# Altium PCB rx_2-5.PcbDoc
Units mm, origin at the board's own origin, x right, y up, seen from the top; angles counter-clockwise.
Board outline 133 x 84.5 mm, 2 copper layers (F.Cu, B.Cu); 65 components, 34 nets, 162 pads, 132 vias.
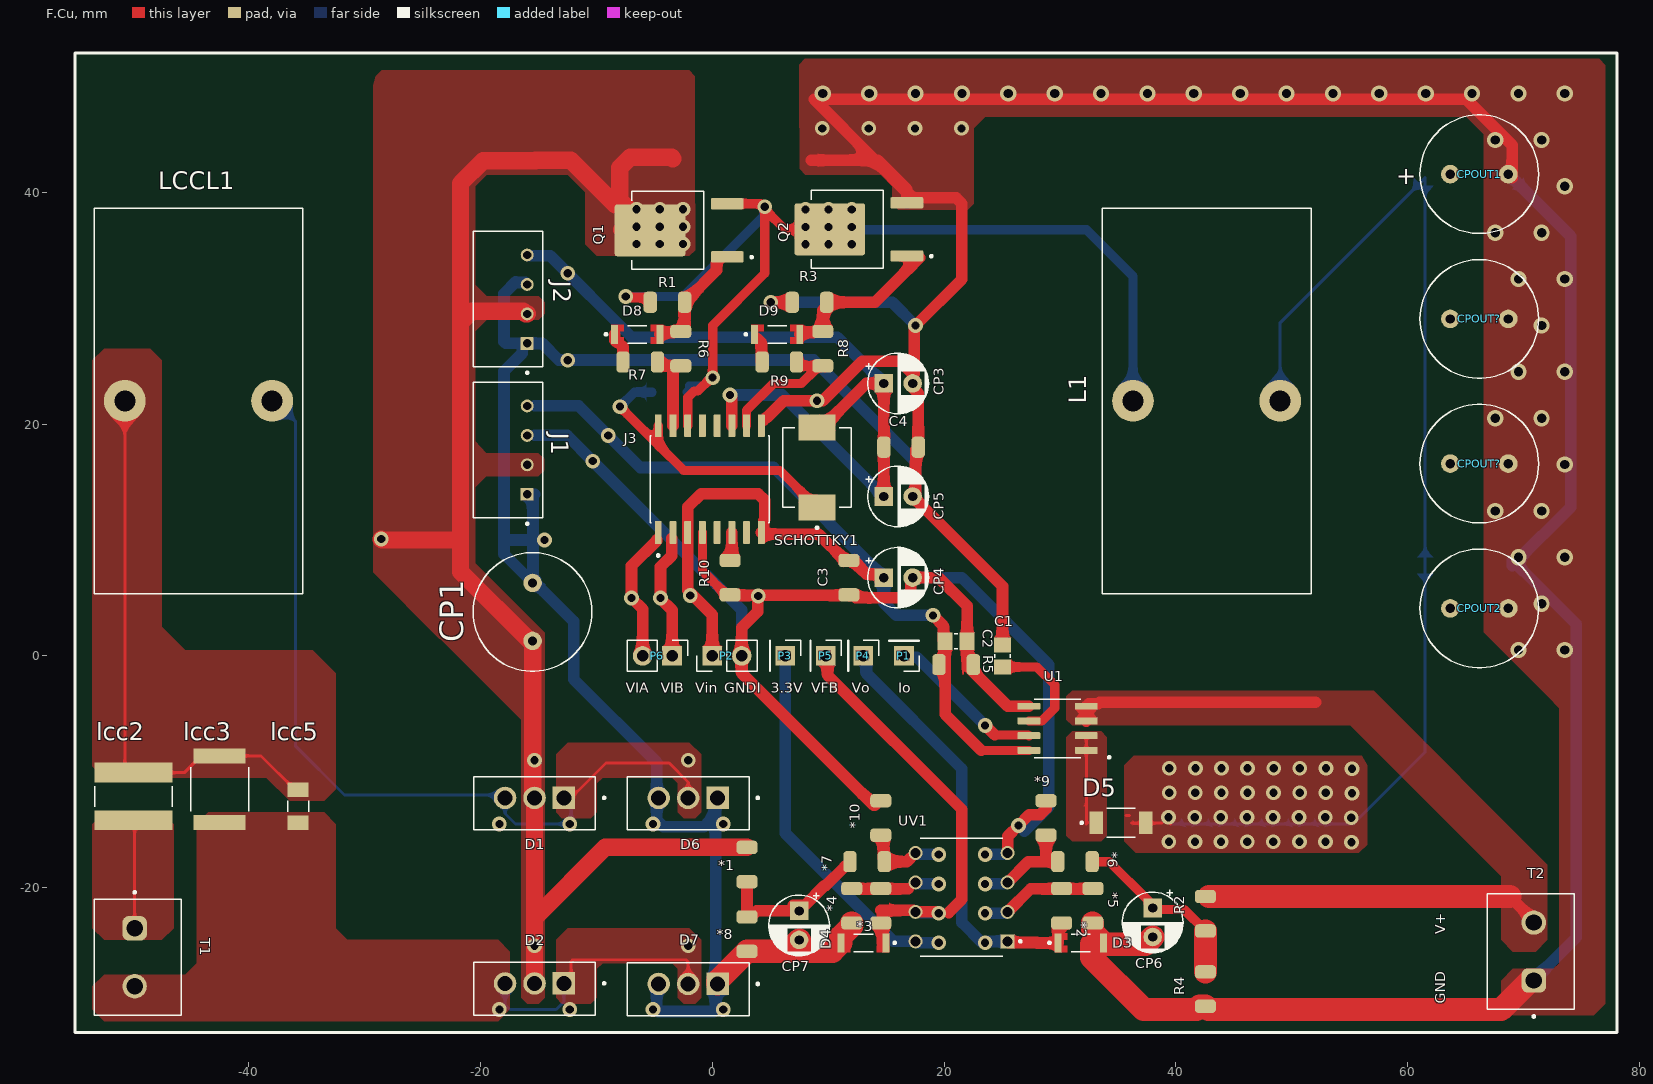
[diagram p0: F.Cu view]
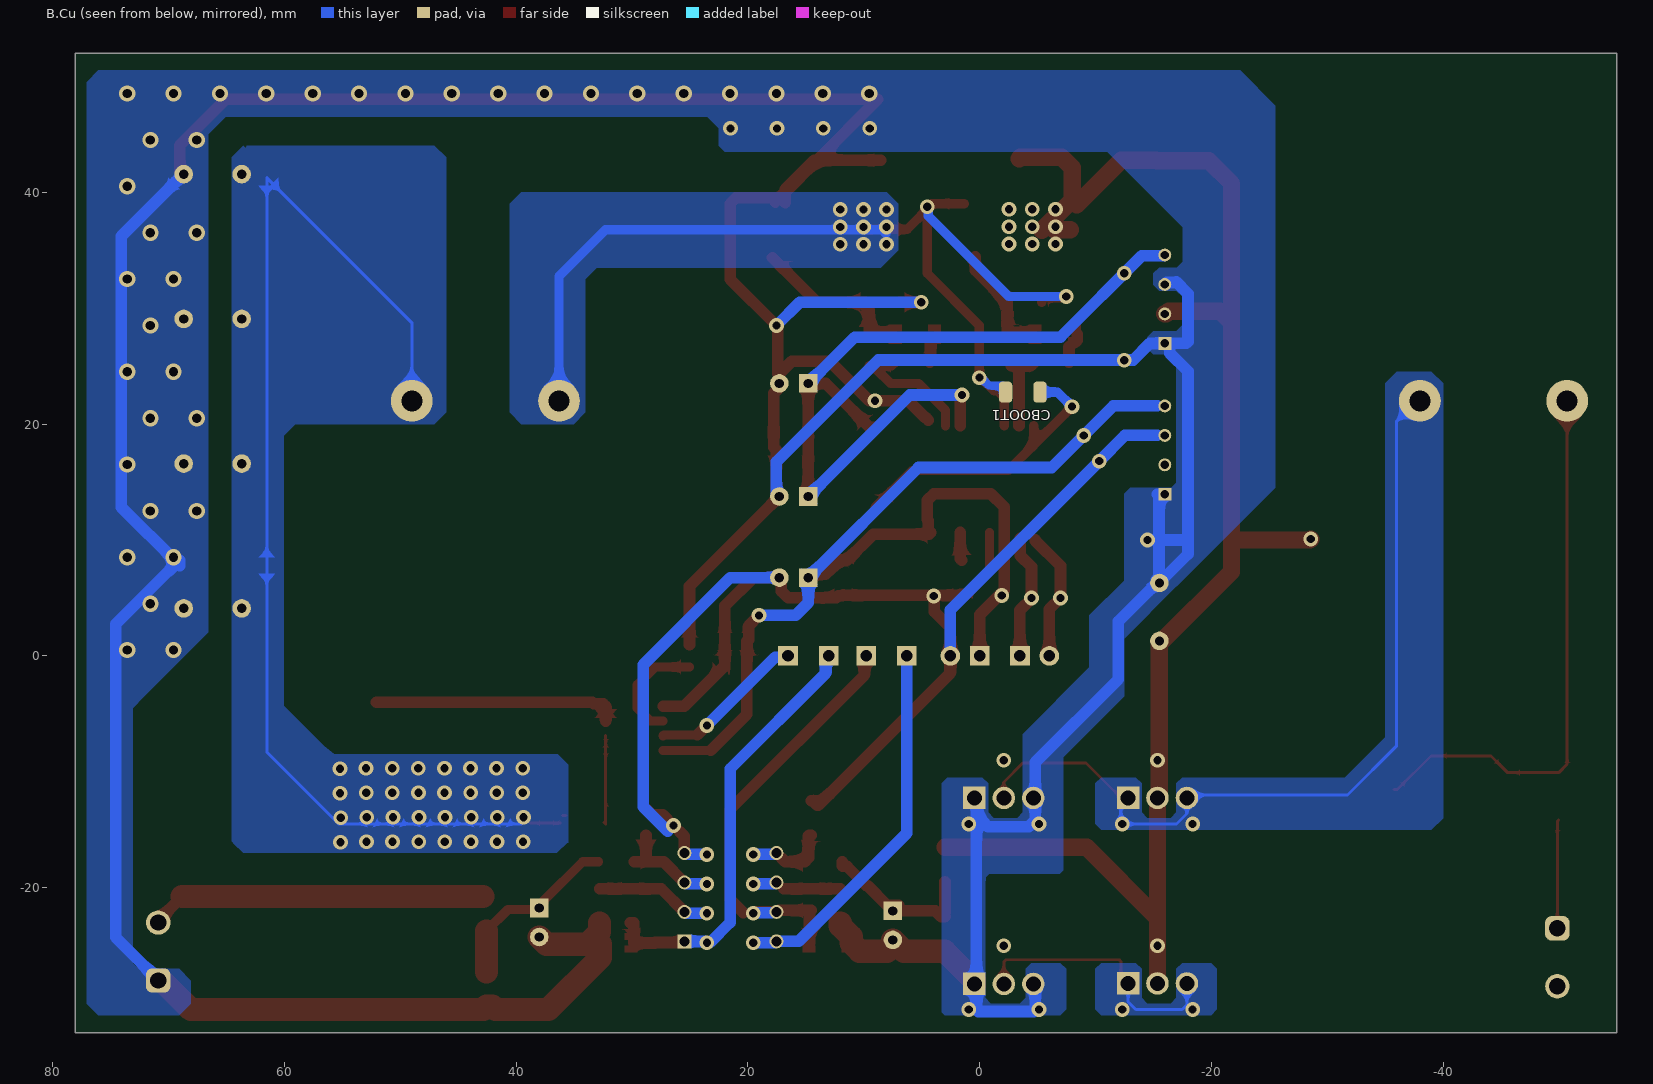
[diagram p1: B.Cu view, seen from below]
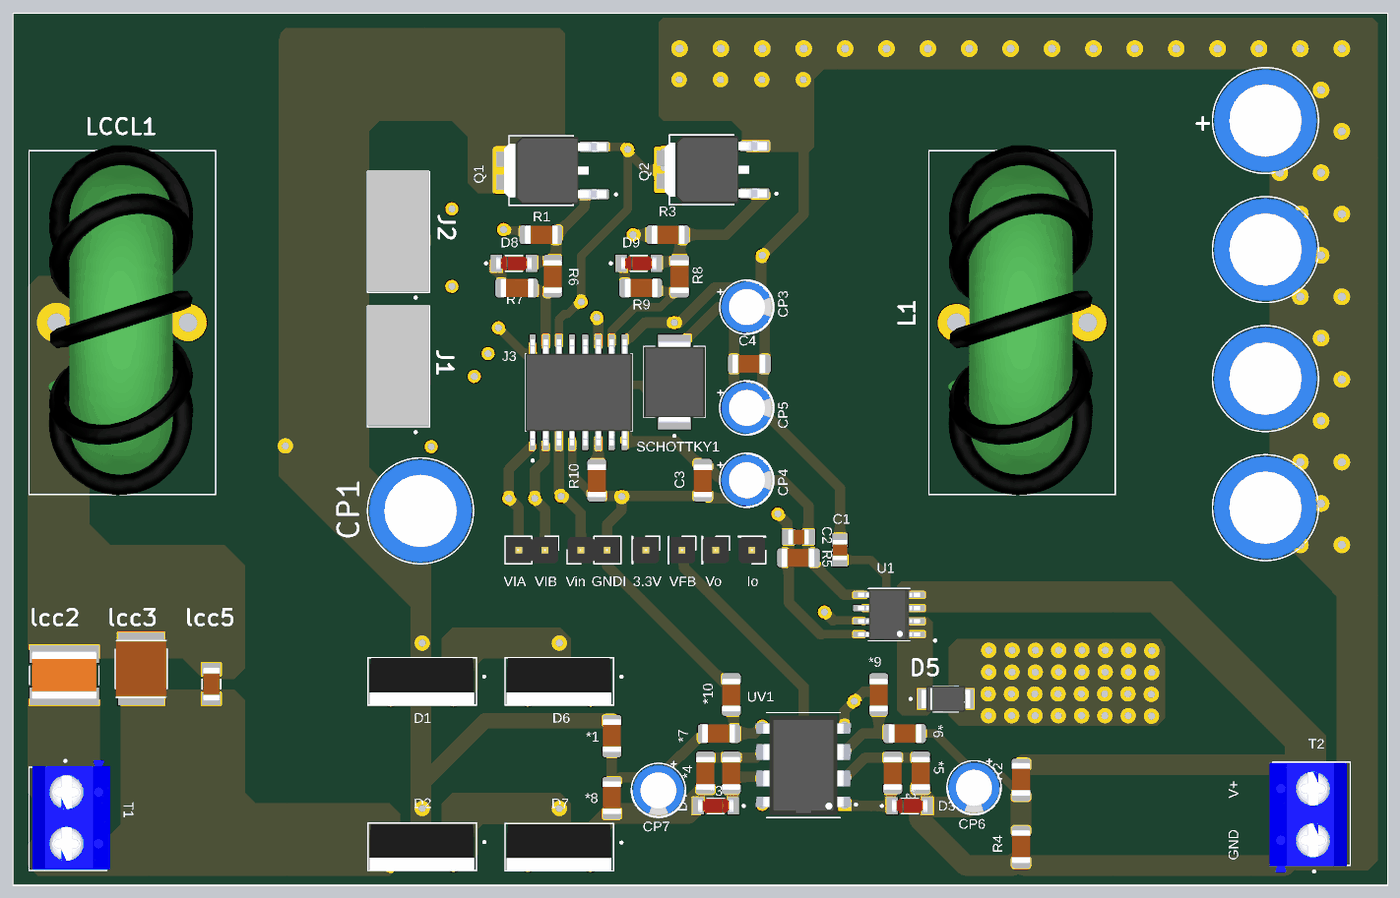
[diagram p2: 3D render of the assembled board from above, using the file's embedded part models]

## Layer stack, top to bottom
F.Mask: solder mask 0.0102, Solder Resist, Dk 3.5
F.Cu: signal copper 0.0356
Dielectric 1: dielectric 0.32, FR-4, Dk 4.8
B.Cu: signal copper 0.0356
B.Mask: solder mask 0.0102, Solder Resist, Dk 3.5

## Board outline
-54.96,-32.5 -54.96,52 78.04,52 78.04,-32.5

## Design rules (kind name [scope] priority, off if disabled: settings)
Clearance [All] p1: gap=0.3 ignorepadtopadclearanceinfootprint=FALSE
Clearance "Clearence 0,2_NetClass" [InNetClass('Default')] p2: gap=0.25 ignorepadtopadclearanceinfootprint=FALSE
Height [All] p1: minheight=0 maxheight=40 prefheight=23
HoleSize "Hole Size (Default)" [All] p1: absolutevalues=TRUE maxlimit=10 minlimit=0.3 maxpercent=80.000 minpercent=20.000
MinimumSolderMaskSliver [All] p1: minsoldermaskwidth=0
PolygonConnect [All] p1: connectstyle=Direct reliefconductorwidth=0.254 reliefentries=4 polygonreliefangle="90 Angle" airgapwidth=0.254
RoutingVias [All] p1: holewidth=0.711 width=1.27 viastyle="Through Hole" minholewidth=0.5 minwidth=0.5 maxholewidth=2 maxwidth=2
SilkToSilkClearance [All] p1: silktosilkclearance=0
SilkToSolderMaskClearance [IsPad] p1: minsilkscreentomaskgap=0 clearancetoexposedcopper=TRUE
SolderMaskExpansion [All] p1: expansion=0.102 istentingtop=FALSE
SupplyNets "Schematic Supply Nets" [InNet('GND')] p1: voltage=0.000
Width [All] p1: maxlimit=2 minlimit=0.254 preferedwidth=0.254 minimp=50.000000 maximp=50.000000 favimp=50.000000
25 further rules are at their usual default settings.

## Components (designator, comment, footprint, x,y, rotation, side; value= is the part's Value field where it differs from the comment)
*1 "R0805" 1206 3,-18 r270 top
*2 "R0805" 1206 30.14,-21.55 r90 top
*3 "R0805" 1206 14.54,-21.55 r90 top
*4 "R0805" 1206 12.04,-21.55 r90 top
*5 "R0805" 1206 32.84,-21.55 r90 top
*6 "R0805" 1206 31.29,-17.75 r180 top
*7 "R0805" 1206 13.365,-17.75 r0 top
*8 "R0805" 1206 3,-24 r270 top
*9 "R0805" 1206 28.79,-13.975 r90 top
*10 "R0805" 1206 14.54,-13.975 r90 top
C1 "C0805" 0805 25.04,0 r90 top
C2 "C0805" 0805 21.04,1.25 r0 top
C3 "C_Small" 1206 11.79,6.75 r90 top
C4 "C_Small" 1206 16.29,18 r0 top
CBOOT1 "C_Small" 1206 -3.71,22.75 r0 bottom
CP1 "C" CPD10 -15.493,1.29 r90 top
CP3 "CP1_Small" CP_Radial_D5.0mm_P2.50mm 14.79,23.5 r0 top
CP4 "CP1_Small" CP_Radial_D5.0mm_P2.50mm 14.79,6.75 r0 top
CP5 "CP1_Small" CP_Radial_D5.0mm_P2.50mm 14.79,13.75 r0 top
CP6 "CP1_Small" CP_Radial_D5.0mm_P2.50mm 38,-21.747 r270 top (schematic designator CP4)
CP7 "CP1_Small" CP_Radial_D5.0mm_P2.50mm 7.5,-22 r270 top (schematic designator CP4)
CPOUT1 "CPout" CPD10 63.665,41.55 r0 top
CPOUT2 "CPout" CPD10 63.665,4.1 r0 top
CPOUT? "CPout" CPD10 63.665,29.067 r0 top
CPOUT? "CPout" CPD10 63.665,16.583 r0 top
D1 "Soki-bridge" TO-220 -15.326,-12.703 r180 top
D2 "Soki-bridge" TO-220 -15.326,-28.703 r180 top
D3 "D_Small" DIO_LL4148 31.79,-24.75 r0 top
D4 "D_Small" DIO_LL4148 13.04,-24.75 r180 top
D5 "Dout" ss54 35.265,-14.4 r0 top
D6 "Soki-bridge" TO-220 -2.076,-12.703 r180 top
D7 "Soki-bridge" TO-220 -2.076,-28.75 r180 top
D8 "D_Small" DIO_LL4148 -6.46,27.735 r0 top
D9 "D_Small" DIO_LL4148 5.6,27.735 r0 top
J1 "B1205S_DCDC" DCDC5V -17.61,17.75 r90 top
J2 "B1212S_DCDC" DCDC5V -17.61,30.77 r90 top
J3 "Si8233" Si8233 -0.21,15.25 r90 top
L1 "INDUCTOR" Inductor 36.29,22 r90 top
lcc2 "MLCC_0.01uF" MLCC1825_0.01uF -49.923,-12.12 r270 top
lcc3 "MLCC_0.2uF" MLCC2220_0.2uF -42.487,-11.5 r90 top
lcc5 "MLCC_0.1uF" MLCC1206_0.1uF -35.71,-12.97 r270 top
LCCL1 "INDUCTOR" Inductor -50.66,22 r90 top
P1 "Conn_01x01" PinHeader_1x01_P2.54mm_Vertical 16.54,0 r180 top
P2 "Conn_01x02" PinHeader_1x02_P2.54mm_Vertical 0,0 r90 top
P3 "Conn_01x01" PinHeader_1x01_P2.54mm_Vertical 6.29,0 r270 top
P4 "Conn_01x01" PinHeader_1x01_P2.54mm_Vertical 13.04,0 r270 top
P5 "Conn_01x01" PinHeader_1x01_P2.54mm_Vertical 9.79,0 r270 top
P6 "Conn_01x02" PinHeader_1x02_P2.54mm_Vertical -3.46,0 r270 top
Q1 "Q_NMOS_DSG" MOSFET -2.85,36.71 r180 top
Q2 "Q_NMOS_DSG" MOSFET 12.65,36.79 r180 top
R1 "R" 1206 -3.86,30.5 r180 top
R2 "R" 1206 42.54,-22.235 r270 top
R3 "R" 1206 8.39,30.5 r180 top
R4 "R" 1206 42.54,-28.735 r270 top
R5 "R0805" 1206 21.04,-0.75 r0 top
R6 "R_Small" 1206 -2.71,26.5 r90 top
R7 "R_Small" 1206 -6.21,25.35 r180 top
R8 "R_Small" 1206 9.54,26.5 r90 top
R9 "R_Small" 1206 5.79,25.35 r180 top
R10 "R_Small" 1206 1.54,6.75 r90 top
SCHOTTKY1 "Schottky" Schottky 9.04,16.25 r90 top
T1 "Screw_Terminal_01x02" Terminal -49.816,-25.998 r270 top
T2 "Screw_Terminal_01x02" Terminal 70.867,-25.5 r90 top
U1 "ACS" SOIC127P600X175-8N 29.79,-6.25 r180 top
UV1 "LM358AN" Dip8 21.51,-20.81 r180 top

## Footprints (in the part's own frame and the unit in brackets; to place one, negate y for a bottom-side part, rotate by r counter-clockwise, add the part's x,y. Pads: shape width x height; smd on the part's side, far side on the other; paste and mask are expansions set on the pad)
0805 [mm]
  rect 1.3x1.5 smd: 1(-0.95,0) 2(0.95,0)
  silkscreen extent -0.15,-0.65 0.15,0.65, body extent -1,-0.72 1,0.72, height 1.39
1206 [mm]
  rrect54% 1.15x1.82 smd: 1(-1.485,0) 2(1.485,0)
  body extent -1.65,-0.9 1.55,0.9, height 1.56
CP_Radial_D5.0mm_P2.50mm [mm]
  rect 1.6x1.6 hole 0.8: 1(0,0)
  round 1.6 hole 0.8: 2(2.5,0)
  silkscreen extent -1.55,-2.62 3.87,2.62, body extent -1.25,-2.5 3.75,2.5, height 5
CPD10 [mm]
  round 1.6 hole 0.8: 1(0,0) 2(5,0)
  silkscreen extent -2.62,-5.12 7.62,5.12, body extent -2.51,-5 7.49,5, height 20
DCDC5V [mm]
  rect 1.11x1.11 / inner round 1.11 / far side rect 1.11x1.11 hole 0.71: 1(-3.81,-1.65)
  round 1.11 hole 0.71: 2(-1.27,-1.65) 3(1.27,-1.65) 4(3.81,-1.65)
  silkscreen extent -6.45,-3 5.84,3, body extent -5.71,-2.95 5.97,3.05, height 10.77
DIO_LL4148 [mm]
  rect 0.6x1.65 smd: 1(-1.95,0) 2(1.95,0)
  F.Cu region: -1.15,0.25 -1.65,0.25 -1.65,-0.25 -1.15,-0.25 -1.15,-0.825 -2.24,-0.825 -2.24,0.825 -1.15,0.825
  F.Cu region: 2.25,-0.825 1.15,-0.825 1.15,-0.25 1.65,-0.25 1.65,0.25 1.15,0.25 1.15,0.825 2.25,0.825
  silkscreen extent -2.8,-0.75 0.83,0.75, body extent -1.7,-0.7 1.7,0.7, height 1.4
Dip8 [mm]
  rect 1.21x1.21 / inner round 1.21 / far side rect 1.21x1.21 hole 0.86: 1(-3.97,3.81)
  round 1.21 hole 0.86: 2(-3.97,1.27) 3(-3.97,-1.27) 4(-3.97,-3.81) 5(3.97,-3.81) 6(3.97,-1.27) 7(3.97,1.27) 8(3.97,3.81)
  silkscreen extent -5.17,-5.08 3.55,5.08, body extent -5.46,-4.79 5.46,4.79, height 5.33
Inductor [mm]
  round 3.6 hole 1.8: 1(0,0) 2(0,-12.7)
  silkscreen extent -16.63,-15.36 16.63,2.66, body extent -23.39,-13.22 24.14,0.78, height 36.79
MLCC1206_0.1uF [mm]
  rect 1.25x1.82 smd: 1(-1.43,0) 2(1.43,0)
  silkscreen extent -0.48,-0.9 0.48,0.9, body extent -1.6,-0.8 1.6,0.8, height 1.8
MLCC1825_0.01uF [mm]
  rect 1.71x6.71 smd: 1(-2.05,0) 2(2.05,0)
  silkscreen extent -0.88,-3.35 0.88,3.35, body extent -2.31,-3.15 2.29,3.15, height 3.4
MLCC2220_0.2uF [mm]
  rect 1.3x4.5 smd: 1(-2.875,0) 2(2.875,0)
  silkscreen extent -1.91,-2.5 1.9,2.5, body extent -2.85,-2.5 2.85,2.5, height 2.8
MOSFET [mm]
  rrect25% 2.83x0.97 smd: 1(-4.14,2.29) 3(-4.14,-2.29)
  rrect10% 6.1x4.49 smd paste-4: 2(2.51,0)
  silkscreen extent -6.35,-3.37 4.1,3.37, body extent -5.33,-3.27 4.57,3.27, height 2.39
PinHeader_1x01_P2.54mm_Vertical [mm]
  rect 1.7x1.7 hole 1: 1(0,0)
  silkscreen extent -1.33,-1.33 1.33,1.33, body extent -1.27,-1.27 1.27,1.27, height 8.54
PinHeader_1x02_P2.54mm_Vertical [mm]
  rect 1.7x1.7 hole 1: 1(0,0)
  rrect100% 1.7x1.7 hole 1: 2(0,-2.54)
  silkscreen extent -1.33,-3.87 1.33,1.33, body extent -1.27,-3.81 1.27,1.27, height 8.54
Schottky [mm]
  rect 2.25x3.18 smd: A(3.455,0) C(-3.455,0)
  silkscreen extent -5.3,-2.95 3.44,2.95, body extent -3.98,-2.95 3.98,2.95, height 2.65
Si8233 [mm]
  rrect25% 1.97x0.6 smd: 1(-4.605,4.445) 2(-4.605,3.175) 3(-4.605,1.905) 4(-4.605,0.635) 5(-4.605,-0.635) 6(-4.605,-1.905) 7(-4.605,-3.175) 8(-4.605,-4.445) 9(4.605,-4.445) 10(4.605,-3.175) 11(4.605,-1.905) 12(4.605,-0.635) 13(4.605,0.635) 14(4.605,1.905) 15(4.605,3.175) 16(4.605,4.445)
  silkscreen extent -6.69,-5.15 3.75,5.15, body extent -5.15,-5.15 5.15,5.15, height 2.65
SOIC127P600X175-8N [mm]
  rrect25% 1.97x0.6 smd: 1(-2.475,1.905) 2(-2.475,0.635) 3(-2.475,-0.635) 4(-2.475,-1.905) 5(2.475,-1.905) 6(2.475,-0.635) 7(2.475,0.635) 8(2.475,1.905)
  silkscreen extent -4.54,-2.52 2,2.6, body extent -3,-2.45 3,2.45, height 1.75
ss54 [mm]
  rect 1.17x1.92 smd: 1(-2.125,0) 2(2.125,0)
  silkscreen extent -3.5,-1.25 1.22,1.25, body extent -2.35,-1.25 2.35,1.25, height 1.1
Terminal [mm]
  rrect50% 2.1x2.1 hole 1.4: 1(-2.5,0)
  round 2.1 hole 1.4: 2(2.5,0)
  silkscreen extent -5.7,-3.5 5,4, body extent -5.68,-3.18 4.92,4.32, height 10
TO-220 [mm]
  rect 1.94x1.94 / inner round 1.94 / far side rect 1.94x1.94 hole 1.29: 1(-2.54,-0.453)
  round 1.94 hole 1.29: 2(0,-0.453) 3(2.54,-0.453)
  silkscreen extent -6.1,-2.3 5.25,2.3, body extent -5.02,-2.25 5.08,2.25, height 15.6

## Part data
C1 C2: "Cap Ceramic 150pF 100V C0G 5% Pad SMD 0805 125Â°C Automotive T/R", Package=None, Availability=Unavailable, MP=GCM2165C2A151JA16D, Price=None
CP1: library part CP1
D1 D2 D6 D7: "10A, 35V, Schottky Rectifier", Package="TO-220AB-3 Taiwan Semiconductor", Check_prices=https://www.snapeda.com/parts/MBR1035CT/Taiwan+Semiconductor/view-part/?ref=eda, MF="Taiwan Semiconductor", MP=MBR1035CT, SnapEDA_Link=https://www.snapeda.com/parts/MBR1035CT/Taiwan+Semiconductor/view-part/?ref=snap
U1: "Current Sensor 5A 1 Channel Hall Effect, Open Loop Bidirectional 8-SOIC (0.154, 3.90mm Width)", Package="SOIC-8 Allegro MicroSystems LLC", Availability="In Stock", Check_prices=https://www.snapeda.com/parts/ACS712ELCTR-05B-T/Allegro%20Industries/view-part/330078/?ref=eda, MF=Allegro, MP=ACS712ELCTR-05B-T, Price=None, SnapEDA_Link=https://www.snapeda.com/parts/ACS712ELCTR-05B-T/Allegro%20Industries/view-part/330078/?ref=snap
UV1: "General Purpose Amplifier 2 Circuit - 8-Mini DIP", Package="DIP-8 STMicroelectronics", Check_prices=https://www.snapeda.com/parts/LM358AN/STMicroelectronics/view-part/?ref=eda, MF=STMicroelectronics, MP=LM358AN, SnapEDA_Link=https://www.snapeda.com/parts/LM358AN/STMicroelectronics/view-part/?ref=snap

## Via types
v1: diameter 1.27, hole 0.711, F.Cu to B.Cu, 89 vias
v2: diameter 1.4, hole 0.8, F.Cu to B.Cu, 37 vias
v3: diameter 1.27, hole 0.7, F.Cu to B.Cu, 6 vias

## Nets (pads, with @x,y where several pads share a name; then routed paths per layer and width w, separated by ;. In a path a pad name is that pad's centre, name@x,y a point inside that pad or via, vN(x,y) a via of type N, cw(c..) or ccw(c..) an arc to the next point about the centre after c; other vN are vias at no path point)
5VSTM: P3.1 UV1.8 | length 32.5
  B.Cu w1: P3.1 6.29,-15.29 15.62,-24.62 17.597,-24.62 17.722,-24.746 v1(19.54,-24.746)
GND: *4.1 *5.1 *8.2 C1.2 C4.2 CP1.2 CP3.2 CP5.2 CP6.2 CP7.2 CPOUT1.2 CPOUT2.2 CPOUT?.2 D3.2 D4.2 D6.1 D6.3 D7.1 D7.3 J1.1 J2.1 J2.3 J3.9 Q2.3 R3.2 R4.2 T2.1 | length 448.9
  F.Cu w1: J3.9@4.435,20.34 4.635,20.54 4.705,20.54 6.165,22 v1(9.04,22) 9.54,22 12.94,25.4 16.215,25.4 17.29,24.325 CP3.2 17.29,23.136 17.775,22.651 C4.2 17.54,17.765 17.54,14 CP5.2 25.04,6 C1.2 ; v1(5.04,30.5) R3.2 ; 8.54,42.75 14.04,42.75 ; 17.415,24.325 17.415,28.375 v1(17.54,28.5) 21.54,32.5 21.54,39 21.04,39.5 Q2.3@17.29,39.5 ; Q2.3@17.643,39.147 Q2.3@17.29,39.5 ; CPOUT1.2@69,41.25 69,44.04 65.04,48 8.79,48 14.04,42.75 ; 14.04,42.75 14.29,42.75 16.79,40.25 16.79,40 ; 14.04,42.75 16.79,40 ; 16.79,40 Q2.3@17.29,39.5 ; 16.79,40 Q2.3 17.21,39.5 Q2.3@17.29,39.5
  F.Cu w2: D7.1 0.464,-28.021 *8.2@3.015,-25.47 ; *8.2 *8.2@3.015,-25.47 ; CP7.2 6.53,-25.47 *8.2@3.015,-25.47 ; 8,-25.47 10.37,-25.47 D4.2 11.09,-24.225 12.04,-23.275 *4.1 ; *5.1@32.79,-23.035 32.79,-23.8 D3.2 ; CP6.2 37.372,-24.875 32.74,-24.875 32.74,-26.025 37.215,-30.5 41.77,-30.5 42.05,-30.22 R4.2 42.82,-30.5 68.04,-30.5 T2.1@70.54,-28
  B.Cu w1: J2.3 -16.124,32.204 -16.874,32.204 -16.94,32.27 -17.96,31.25 -17.96,27.109 -17.811,26.96 J2.1 ; -15.31,13.94 -15.46,13.79 -15.46,10 ; CP1.2@-15.21,6.5 CP1.2@-15.21,6.562 ; v3(-14.46,10) -15.46,10 ; D7.3@-4.79,-28.297 -4.79,-30.521 -4.641,-30.67 0.141,-30.67 0.29,-30.521 D7.1@0.29,-28.297 ; D6.1@0.29,-12.25 0.29,-13.75 ; D7.1 D7.1@0.29,-28.297 ; v1(5.04,30.5) 15.54,30.5 v1(17.54,28.5) ; CP5.2 17.54,14 17.54,16.75 8.77,25.52 -13.23,25.52 -14.67,26.96 J2.1 ; CPOUT1.2@69,41.25 74.04,36.21 74.04,12.83 v2@69.236,8.026 ; T2.1 70.867,-27.958 74.54,-24.284 74.54,2.75 69.972,7.318 69.945,7.318 v2@69.236,8.026 ; -17.96,10 -15.46,10 ; -17.96,10 -17.96,24.54 -16.388,26.112 -16.388,26.532 J2.1 ; -17.96,10 -17.96,8.79 CP1.2@-15.46,6.29 ; CP1.2@-15.46,6.29 -15.46,10 ; CP1.2@-15.46,6.29 -15.25,6.29 -11.96,3 -11.96,-2 -4.79,-9.17 -4.79,-14.17 -4.21,-14.75 -0.71,-14.75 0.29,-13.75 ; D7.1@0.29,-28.297 0.29,-13.75 ; v2@69.236,8.026 69,8.262 69,7.79 v2@69.236,8.026
  other v1: -5.107,-30.5 0.954,-30.5 -5.107,-14.5 0.954,-14.5 -12.46,25.5 9.5,45.5 13.5,45.5 17.5,45.5 21.5,45.5
  other v2: 69.54,0.5 73.54,0.5 71.54,4.5 69.54,8.5 73.54,8.5 67.54,12.5 71.54,12.5 73.54,16.5 67.54,20.5 71.54,20.5 69.54,24.5 73.54,24.5 71.54,28.5 69.54,32.5 73.54,32.5 67.54,36.5 71.54,36.5 73.54,40.5 67.54,44.5 71.54,44.5 9.54,48.5 13.54,48.5 17.54,48.5 21.54,48.5 25.54,48.5 29.54,48.5 33.54,48.5 37.54,48.5 41.54,48.5 45.54,48.5 49.54,48.5 53.54,48.5 57.54,48.5 61.54,48.5 65.54,48.5 69.54,48.5 73.54,48.5
GNDI: *9.2 *10.2 C2.2 C3.1 CP4.2 J1.3 J3.4 P2.2 R5.2 R10.1 U1.5 UV1.4 | length 131.4
  F.Cu w0.8: J3.4 -0.845,7.315 R10.1@1.205,5.265
  F.Cu w1: R10.1@1.205,5.265 R10.1@1.363,5.265 ; R10.1 1.776,5.265 1.821,5.22 3.92,5.22 v1(3.965,5.175) ; *10.2 14.205,-12.49 14.13,-12.565 14.13,-12.799 14.035,-12.894 13.934,-12.894 2.54,-1.5 P2.2 2.54,2.45 3.913,3.823 3.913,5.123 v1(3.965,5.175) ; UV1.4 25.48,-15.56 v1(26.417,-14.623) 27.354,-13.686 28.297,-13.686 28.797,-13.185 ; U1.5 25.485,-4.345 21.99,-0.85 C2.2 21.99,4.3 19.54,6.75 CP4.2 17.29,6.588 17.109,6.407 17.109,5.586 16.523,5 12.39,5 12.2,5.19 11.865,5.19 C3.1 11.745,5.22 4.01,5.22 v1(3.965,5.175)
  B.Cu w1: -15.31,19.02 -12.52,19.02 v1(-10.3,16.8) 2.54,3.96 P2.2 ; CP4.2 21.54,6.75 29.04,-0.75 29.04,-13 26.917,-15.123 ; v1(23.54,-17.126) 25.298,-17.126 25.423,-17 UV1.4
HS3: CBOOT1.2 J3.14 L1.1 Q1.3 Q2.2 R1.2 | length 95.8
  F.Cu w0.254: Q2.2@8.04,36.5 9.85,36.5 Q2.2
  F.Cu w0.8: v1(-7.46,31) -7.37,30.91 -5.52,30.91 -5.345,30.735 R1.2 ; J3.14 -2.115,22.281 -1.549,22.847 -1.24,22.847 -0.087,24 v3(0.04,24) 0.04,28.5 4.54,33 v1(4.54,38.75) ; Q1.3@1.33,39 4.163,39 4.413,38.75 v1(4.54,38.75) ; Q2.2 6.25,36.79 4.63,38.41 4.63,38.66 v1(4.54,38.75)
  B.Cu w0.7: CBOOT1.2 -2,22.975 -2,23.31 -0.804,23.31 -0.114,24 v3(0.04,24)
  B.Cu w0.8: v1(-7.46,31) -2.5,31 4.45,37.95 4.45,38.66 v1(4.54,38.75) ; v1@8.04,36.5 8.167,36.5 8.417,36.75 32.29,36.75 36.29,32.75 L1.1
  other v1: 8.04,35.5 10.04,35.5 12.04,35.5 8.04,37 10.04,37 12.04,37 8.04,38.5 10.04,38.5 12.04,38.5
Iin: D5.1 U1.1 U1.2 | length 7.8
  F.Cu w0.254: U1.2 U1.1 32.265,-14.5 ; 32.403,-14.363 32.265,-14.5 ; 32.265,-14.5 32.263,-14.502 32.265,-14.502 32.265,-14.5
Iout: R2.1 T2.2 U1.3 U1.4 | length 49.9
  F.Cu w1: U1.3 U1.4 32.465,-4.145 33.282,-4.145 33.427,-4 52.04,-4 ; R2.1 R2.1@42.875,-20.75 ; 68.79,-20.75 T2.2@70.54,-22.5
  F.Cu w2: R2.1@42.875,-20.75 68.79,-20.75
ISIG: P1.1 U1.7 | length 13.7
  F.Cu w0.8: 24.358,-6.817 27.248,-6.817 U1.7
  F.Cu w1: v3(23.54,-6) 24.358,-6.817
  B.Cu w1: P1.1@16.54,0.25 16.89,-0.1 17.64,-0.1 v3(23.54,-6)
Net*2_2: *2.2 *5.2 UV1.2 | length 10.1
  F.Cu w1: UV1.2 27.46,-20.1 *5.2@32.79,-20.1
  B.Cu w1: v1(23.54,-22.206) 25.298,-22.206 25.423,-22.08 UV1.2
Net*3_2: *3.2 *4.2 UV1.6 | length 6.9
  F.Cu w1: *4.2@12.04,-20.1 16.923,-20.1
  B.Cu w1: UV1.6 17.597,-19.54 17.722,-19.666 v1(19.54,-19.666)
Net*6_2: *6.2 *9.1 UV1.3 | length 9.4
  F.Cu w1: UV1.3 27.27,-17.75 28.59,-17.75 ; *9.1 28.79,-17.55 28.59,-17.75 ; *6.2 28.59,-17.75
  B.Cu w1: v1(23.54,-19.666) 25.298,-19.666 25.423,-19.54 UV1.3
Net*7_2: *7.2 *10.1 UV1.5 | length 7.4
  F.Cu w1: *10.1 14.7,-15.46 14.775,-15.535 14.775,-17.425 15.1,-17.75 16.79,-17.75 UV1.5
  B.Cu w1: UV1.5 17.597,-17 17.722,-17.126 v1(19.54,-17.126)
NetC1_1: C1.1 U1.6 | length 9.8
  F.Cu w0.8: C1.1 27.99,-0.95 29.54,-2.5 29.54,-4.5 28.425,-5.615 U1.6
NetCBOOT1_1: CBOOT1.1 J3.16 SCHOTTKY1.C | length 25.5
  F.Cu w0.8: v1(-7.96,21.5) -4.655,18.195 ; J3.16 -4.655,18.195 ; SCHOTTKY1.C 5.835,16 -2.46,16 -4.655,18.195
  B.Cu w0.8: v1(-7.96,21.5) -6.71,22.75 CBOOT1.1
NetCPOUT1_1: CPOUT1.1 CPOUT2.1 CPOUT?.1 D5.2 L1.2 | length 101.5
  F.Cu w0.254: 35.69,-13.775 35.99,-13.775 ; 36.163,-14.423 38.79,-14.423 ; v1@39.463,-14.423 v1@39.54,-14.5
  B.Cu w0.254: v1@39.54,-14.5 55.29,-14.5 61.5,-8.29 61.5,7.79 61.5,41.25 48.99,28.74 L1.2
  other v1: 55.15,-16.067 39.39,-16.025 41.641,-16.025 43.893,-16.025 46.144,-16.025 48.396,-16.025 50.647,-16.025 52.899,-16.025 55.125,-13.958 39.365,-13.917 41.616,-13.917 43.868,-13.917 46.119,-13.917 48.371,-13.917 50.622,-13.917 52.874,-13.917 55.175,-11.85 39.415,-11.808 41.666,-11.808 43.918,-11.808 46.169,-11.808 48.421,-11.808 50.672,-11.808 52.924,-11.808 55.185,-9.742 39.425,-9.7 41.676,-9.7 43.928,-9.7 46.179,-9.7 48.431,-9.7 50.682,-9.7 52.934,-9.7
NetD1_1: D1.1 D1.3 D6.2 LCCL1.2 | length 74.9
  F.Cu w0.254: D1.1@-12.17,-12.25 -9.17,-9.25 -3.71,-9.25 -2.076,-10.884 D6.2
  B.Cu w0.254: LCCL1.2@-38.642,22.932 -35.96,20.25 -35.96,-7.75 -31.71,-12 D1.3@-17.5,-12 ; D1.3 -17.866,-13.594 -16.96,-14.5 -12.46,-14.5 -12.17,-14.21 D1.1@-12.17,-12.25
  other v1: -18.357,-14.5 -12.296,-14.5 -2.076,-9
NetD2_1: D2.1 D2.3 D7.2 lcc3.1 lcc5.2 T1.2 | length 23
  F.Cu w0.254: D2.1@-12.17,-28.25 -12.17,-26.359 -12.021,-26.21 -2.25,-26.21 -2.076,-26.384 D7.2
  B.Cu w0.254: D2.3 -17.866,-30.094 -17.46,-30.5 -13.46,-30.5 -12.786,-29.826 D2.1
  other v1: -18.357,-30.5 -12.296,-30.5 -2.076,-25
NetD8_1: D8.1 R7.2 | length 2.8
  F.Cu w1: D8.1 -8.41,27.21 -8.237,27.037 -8.091,27.037 -7.695,26.641 R7.2
NetD9_1: D9.1 R9.2 | length 2.2
  F.Cu w1: D9.1@3.85,27.41 4.23,27.03 4.23,25.425 R9.2
NetJ3_1: J3.1 P6.2 | length 11.3
  F.Cu w1: P6.2 -6,4.04 v1(-6.96,5) -6.96,7.765 -4.786,9.939 J3.1@-4.786,10.003
NetJ3_2: J3.2 P6.1 | length 11
  F.Cu w1: J3.2@-3.486,10.16 -3.486,8.649 -4.46,7.675 -4.46,4.927 -3.46,3.927 P6.1
  other v1: -4.46,5
NetJ3_6: J3.6 R10.2 | length 2.5
  F.Cu w1: R10.2 1.695,8.39 J3.6
NetJ3_10: J3.10 R8.1 R9.1 | length 11.6
  F.Cu w0.8: J3.10 2.965,21.175 5.29,23.5 7.69,23.5 R8.1@9.205,25.015 ; R9.1 7.61,25.015 R8.1@9.205,25.015 ; R8.1 R8.1@9.205,25.015
NetJ3_15: J3.15 R6.1 R7.1 | length 7.7
  F.Cu w1: R7.1 -4.39,25.015 R6.1 -2.943,25.015 -3.377,24.581 -3.377,24.348 -3.385,24.34 J3.15
Netlcc2_1: lcc2.1 lcc3.2 lcc5.1 LCCL1.1 | length 48.6
  F.Cu w0.254: LCCL1.1@-50.66,22.25 -50.66,-9.342 -49.932,-10.07 lcc2.1 -45.532,-10.07 -44.087,-8.625 lcc3.2 -38.91,-8.625 -35.995,-11.54 lcc5.1
Netlcc2_2: lcc2.2 T1.1 | length 9.4
  F.Cu w0.254: lcc2.2 -49.817,-14.277 T1.1
V+: *1.1 CP1.1 D1.2 D2.2 J1.2 J2.2 Q1.2 | length 134.3
  F.Cu w1.5: v3(-28.55,10.075) -28.475,10 -21.71,10 ; J2.2 -16.069,29.5 -16.299,29.73 -20.73,29.73 -21.71,28.75 ; CP1.1@-15.622,1.162 -21.71,7.25 -21.71,10 ; D1.2@-15.494,-12.082 -15.494,-9 CP1.1@-15.494,1.29 ; D2.2 v1(-15.326,-25) -15.326,-22.616 ; D1.2 -15.326,-22.616 ; -8.374,38.919 -12.205,42.75 -15.21,42.75 -15.242,42.718 -19.742,42.718 -21.71,40.75 -21.71,28.75 ; Q1.2@-7.808,36.75 Q1.2@-6.415,36.75 ; Q1.2 -5.907,37.257 -6.85,38.2 -7.971,39.321 -7.971,42.11 -7.081,43 -3.5,43 -3.392,42.892 ; *1.1 2.993,-16.515 2.978,-16.5 -9.21,-16.5 -15.326,-22.616 ; -21.71,10 -21.71,28.75
  B.Cu w0.254: D1.2@-15.494,-12.082 D1.2
  other v1: -15.326,-9 -6.525,35.525 -4.525,35.525 -2.525,35.525 -6.525,37.025 -4.525,37.025 -2.525,37.025 -6.525,38.525 -4.525,38.525 -2.525,38.525
VDDA3: C4.1 CP3.1 CP5.1 J2.4 J3.11 SCHOTTKY1.A | length 72
  F.Cu w1: v3(1.54,22.5) 1.54,22.427 1.695,22.272 J3.11 ; SCHOTTKY1.A 9.505,19.705 13.3,23.5 CP3.1 14.805,23.485 C4.1 14.805,13.765 CP5.1
  B.Cu w1: J2.4 -15.93,34.58 -15.874,34.524 -13.984,34.524 -6.96,27.5 10.79,27.5 CP3.1 ; v3(1.54,22.5) 6.04,22.5 CP5.1
  other v1: -12.46,33
VDDI3: C2.1 C3.2 CP4.1 J1.4 J3.3 J3.8 P2.1 R5.1 U1.8 | length 96.7
  F.Cu w0.8: 23.195,-8.155 U1.8
  F.Cu w1: P2.1 0,3.55 -2.115,5.665 -2.115,12.845 -0.96,14 3.954,14 4.54,13.414 4.54,11.767 4.435,11.662 4.435,10.845 J3.8 4.38,10.5 9.19,10.5 11.455,8.235 C3.2 12.125,8.235 13.31,7.05 14.49,7.05 CP4.1 ; v3@19.092,3.448 19.94,2.6 19.94,1.4 C2.1 20.09,-0.75 20.09,-5.05 23.195,-8.155
  B.Cu w1: -15.31,21.56 -11.52,21.56 -6.21,16.25 5.29,16.25 CP4.1 14.79,4.586 15.876,3.5 v3(19.04,3.5)
  other v1: -1.9,5.2 -8.96,19
VFB: *1.2 *7.1 *8.1 CP7.1 | length 15.4
  F.Cu w1: *8.1 3.335,-22.515 3.85,-22 CP7.1 ; *8.1@3,-22.105 *1.2 ; *7.1 11.88,-18.085 11.805,-18.16 11.45,-18.16 9.769,-19.841 9.659,-19.841 CP7.1@8,-21.5 ; CP7.1 7,-21.5 CP7.1@8,-21.5 ; CP7.1 CP7.1@8,-21.5
VFBout: *3.1 D4.1 P5.1 UV1.7 | length 37
  F.Cu w1: P5.1 9.951,-0.161 9.951,-1.661 21.54,-13.25 21.54,-21 20.386,-22.154 ; D4.1@14.69,-24.75 14.69,-22.1 14.54,-21.95 17.353,-21.95 17.483,-22.08 UV1.7 19.341,-22.08 19.467,-22.206 v1(19.54,-22.206)
  B.Cu w1: UV1.7@18.001,-22.148 18.007,-22.154 19.488,-22.154 v1(19.54,-22.206)
VOA3: D8.2 Q1.1 R1.1 R6.2 | length 9.9
  F.Cu w1: D8.2 -4.335,27.91 -2.785,27.91 R6.2 -2.45,27.985 -2.375,28.06 -2.375,30.835 -2.3,30.91 -1.965,30.91 0.375,33.25 Q1.1@0.375,34.405
VOB3: D9.2 Q2.1 R3.1 R8.2 | length 14.3
  F.Cu w1: D9.2 7.725,27.91 9.465,27.91 R8.2 9.54,29.83 9.875,30.165 R3.1 14.04,30.5 Q2.1@17.88,34.34
Vout: *2.1 D3.1 P4.1 UV1.1 | length 37.9
  F.Cu w1: UV1.1 25.583,-24.723 27.988,-24.723 28.04,-24.775 28.053,-24.763 29.828,-24.763 D3.1 29.84,-23.035 *2.1
  B.Cu w1: P4.1@13.04,0.25 13.29,0 13.29,-1.5 21.54,-9.75 21.54,-23 23.234,-24.694 23.488,-24.694 v1(23.54,-24.746) 23.613,-24.746 23.739,-24.62 UV1.1
VSIG: *6.1 CP6.1 R2.2 R4.1 | length 16.4
  F.Cu w0.8: *6.1@32.89,-17.75 34.25,-17.75 37.6,-21.1 37.6,-21.347 37.877,-21.623 38.123,-21.623 38.123,-21.87 40.69,-21.87 R2.2 ; R4.1@42.106,-27.25 R4.1
  F.Cu w2: R4.1 R2.2
pads on no net: J3.5 J3.7 J3.12 J3.13

## Polygon pours and split planes (outlines as drawn)
NetCPOUT1_1 on F.Cu "NONET_L-01_P-001" (solid, pour order 15): 35.54,-12.25 35.525,-11.975 35.525,-9.425 36.35,-8.6 56.025,-8.6 56.48,-9.425 56.49,-9.435 56.49,-16.275 55.765,-17 36.54,-17 35.54,-16 35.54,-12.5
Netlcc2_1 on F.Cu "NONET_L-01_P-001" (solid, pour order 2): -38.46,-10.5 -36.46,-12.5 -33.46,-12.5 -32.46,-11.5 -32.46,-1.5 -34.46,0.5 -45.46,0.5 -47.46,2.5 -47.46,25.5 -48.46,26.5 -52.46,26.5 -53.46,25.5 -53.46,-9.5 -52.46,-10.5
NetD2_1 on F.Cu "j" (solid, pour order 1): -44.46,-14.5 -43.46,-13.5 -33.46,-13.5 -32.46,-14.5 -32.46,-23.5 -31.46,-24.5 -18.46,-24.5 -17.46,-25.5 -17.46,-30.5 -18.46,-31.5 -52.46,-31.5 -53.46,-30.5 -53.46,-28.5 -52.46,-27.5 -45.46,-27.5 -44.46,-26.5
V+ on F.Cu "NONET_L-01_P-001" (solid, pour order 9): -1.46,39 -1.5,39.04 -1.5,50 -2,50.5 -28.5,50.5 -29,50 -29.225,49.225 -29.225,7.2 -23.525,1.5 -23.46,1.5 -16.46,-5.5 -16.46,-29.5 -15.96,-30 -14.96,-30 -14.46,-29.5 -14.46,2 -16.96,4.5 -20.46,8 -20.46,14.54 -19.5,15.5 -15,15.5 -14.5,16 -14.5,17 -15,17.5 -19.5,17.5 -20.46,18.5 -20.46,28 -19.46,29 -14.96,29 -14.46,29.5 -14.46,30.5 -14.96,31 -19.46,31 -20.46,32 -20.46,40.5 -19.46,41.5 -12.46,41.5 -10.96,40 -10.96,35.5 -9.96,34.5 -1.96,34.5 -1.46,35
Iout on F.Cu "NONET_L-01_P-001" (solid, pour order 18): 72.04,-18 57.04,-3 31.04,-3 30.54,-3.5 30.54,-5.5 31.04,-6 55.04,-6 68.04,-19 68.04,-24.5 69.04,-25.5 71.04,-25.5 72.04,-24.5
Iin on F.Cu "NONET_L-01_P-001" (solid, pour order 17): 30.54,-15.5 31.04,-16 33.54,-16 34.04,-15.5 34.04,-7 33.54,-6.5 31.04,-6.5 30.54,-7
GND on F.Cu "NONET_L-01_P-001" (solid, pour order 12): 7.54,45.5 7.5,45.54 7.5,51 8,51.5 76.5,51.5 77.04,50.96 77.04,-30 76.04,-31 69.04,-31 68.04,-30 68.04,-28 69.04,-27 72.54,-27 73.04,-26.5 73.04,-4.5 72.54,-4 72.589,-4 66.54,2.049 66.54,45 65.04,46.5 23.54,46.5 22.54,45.5 22.54,39 22.04,38.5 16.04,38.5 15.54,39 15.54,40.5 14.54,41.5 8.04,41.5 7.54,42
NetD1_1 on F.Cu "NONET_L-01_P-001" (solid, pour order 7): -12.96,-14 -13.46,-13.5 -13.46,-8.5 -12.46,-7.5 -1.96,-7.5 -0.96,-8.5 -0.96,-13.5 -1.46,-14 -2.46,-14 -2.96,-13.5 -2.96,-11 -3.46,-10.5 -9.46,-10.5 -9.96,-11 -9.96,-13.5 -10.46,-14
NetD2_1 on F.Cu "NONET_L-01_P-001" (solid, pour order 8): -12.96,-30 -13.46,-29.5 -13.46,-24.5 -12.46,-23.5 -1.96,-23.5 -0.96,-24.5 -0.96,-29.5 -1.46,-30 -2.46,-30 -2.96,-29.5 -2.96,-27 -3.46,-26.5 -9.46,-26.5 -9.96,-27 -9.96,-29.5 -10.46,-30
Netlcc2_2 on F.Cu "NONET_L-01_P-001" (solid, pour order 0): -47.46,-24.5 -46.46,-23.5 -46.46,-14.5 -47.46,-13.5 -52.46,-13.5 -53.46,-14.5 -53.46,-23.5 -52.46,-24.5
NetCPOUT1_1 on B.Cu "NONET_L-01_P-001" (solid, pour order 22): 60.04,-4.3 56.6,-7.74 55.7,-8.5 36.4,-8.5 35.5,-9.4 35.5,-16.1 35.6,-16.1 36.5,-17 63.54,-17 64.4,-16.14 64.4,-4.9 60.64,-4.9
NetCPOUT1_1 on B.Cu "NONET_L-01_P-001" (solid, pour order 14): 46.04,21 47.04,20 59.04,20 60.04,19 60.04,-4.3 63.54,-17 64.54,-16 64.54,43 63.54,44 63.04,43.5 63.54,44 48.04,44 47.04,44 46.04,43
NetD2_1 on B.Cu "NONET_L-01_P-001" (solid, pour order 3): -16.96,-27 -17.46,-26.5 -19.96,-26.5 -20.46,-27 -20.46,-30.5 -19.96,-31 -10.46,-31 -9.96,-30.5 -9.96,-27 -10.46,-26.5 -13.46,-26.5 -13.96,-27 -13.96,-29.5 -14.46,-30 -16.46,-30 -16.96,-29.5
NetD1_1 on B.Cu "NONET_L-01_P-001" (solid, pour order 4): -38.96,24.5 -39.96,23.5 -39.96,-14 -38.96,-15 -19.96,-15 -10.46,-15 -9.96,-14.5 -9.96,-11 -10.46,-10.5 -13.46,-10.5 -13.96,-11 -13.96,-13.5 -14.46,-14 -16.46,-14 -16.96,-13.5 -16.96,-11 -17.46,-10.5 -31.46,-10.5 -34.96,-7 -34.96,23.5 -35.96,24.5
GND on B.Cu "NONET_L-01_P-001" (solid, pour order 10): 23.5,46.5 22.5,45.5 21.5,45.5 20.5,46.5 -22.46,46.5 -23.46,47.5 -23.46,49.5 -22.46,50.5 76.04,50.5 77.04,49.5 77.04,-30 76.04,-31 69.04,-31 68.04,-30 68.04,-28 69.04,-27 72.54,-27 73.04,-26.5 73.04,-4.5 72.54,-4 72.589,-4 66.54,2.049 66.54,45 65.04,46.5
HS3 on B.Cu "NONET_L-01_P-001" (solid, pour order 13): 35.04,20 38.04,20 39.04,21 38.04,20 39.54,20 40.54,21 40.54,37.5 40.54,40 40.54,39 39.54,40 8.04,40 7.04,39 7.04,35 8.54,33.5 34.04,33.5 33.04,33.5 34.04,32.5 34.04,21
GND on B.Cu "NONET_L-01_P-001" (solid, pour order 20): -13.96,5.5 -13.46,6 -13.46,7 -13.96,7.5 -15.96,7.5 -16.96,8.5 -16.96,25.014 -15.974,26 -14.96,26 -14.46,26.5 -14.46,27.5 -14.96,28 -17.96,28 -18.46,27.5 -18.46,8 -15.96,5.5
GND on B.Cu "NONET_L-01_P-001" (solid, pour order 5): -7.2,-14.8 -7.2,-14.99 -7.2,-18.5 -6.9,-18.8 -0.8,-18.8 -0.4,-19.2 -0.5,-19.1 -0.46,-19.8 -0.46,-29.5 -0.96,-30 -3.46,-30 -3.96,-29.5 -3.96,-27 -4.46,-26.5 -6.96,-26.5 -7.46,-27 -7.46,-30.5 -6.96,-31 3.04,-31 3.29,-30.75 3.29,-11 2.79,-10.5 -0.21,-10.5 -0.71,-11 -0.71,-13.5 -1.21,-14 -3.21,-14 -3.71,-13.5 -3.71,-6.75 -9.46,-1 -9.46,3.5 -12.46,6.5 -12.46,14 -12.96,14.5 -16.46,14.5 -16.48,14.48 -17.5,15.5 -17.5,24.5 -16,26 -14.96,26 -14.46,26.5 -14.46,27.5 -14.96,28 -16.96,28 -17.46,28.5 -17.46,31 -16.96,31.5 -15.46,31.5 -14.96,32 -14.96,33 -15.46,33.5 -17,33.5 -17.5,34 -17.5,36.975 -13.375,41.1 -13.375,41.125 -11,43.5 22,43.5 22.5,44 22.5,50 22,50.5 -22.46,50.5 -25.5,47.46 -25.5,14.5 -17,6 -16.96,6 -12.46,1.5 -12.46,-3.5 -7.21,-8.75 -7.21,-14.5

## Silkscreen, mask and mechanical layers (free items; w line width, h text height)
F.SilkS:
  the board outline again, w0.254
  text "+" at 58.994,40.675 h1.52
  text "GNDI" at 1.04,-3.483 h1.52
  text "3.3V" at 5.04,-3.483 h1.52
  text "Vo" at 12.041,-3.484 h1.52
  text "Io" at 16.04,-3.484 h1.52
  text "VIA" at -7.459,-3.5 h1.52
  text "VIB" at -4.459,-3.5 h1.52
  text "Vin" at -1.459,-3.5 h1.52
  text "VFB" at 8.541,-3.5 h1.52
  text "V+" at 63.54,-23.999 h1.52 r90
  text "GND" at 63.523,-30 h1.52 r90